# EAGLE board VCSeq PCB2 1.5 TH (EAGLE 6.5.0)
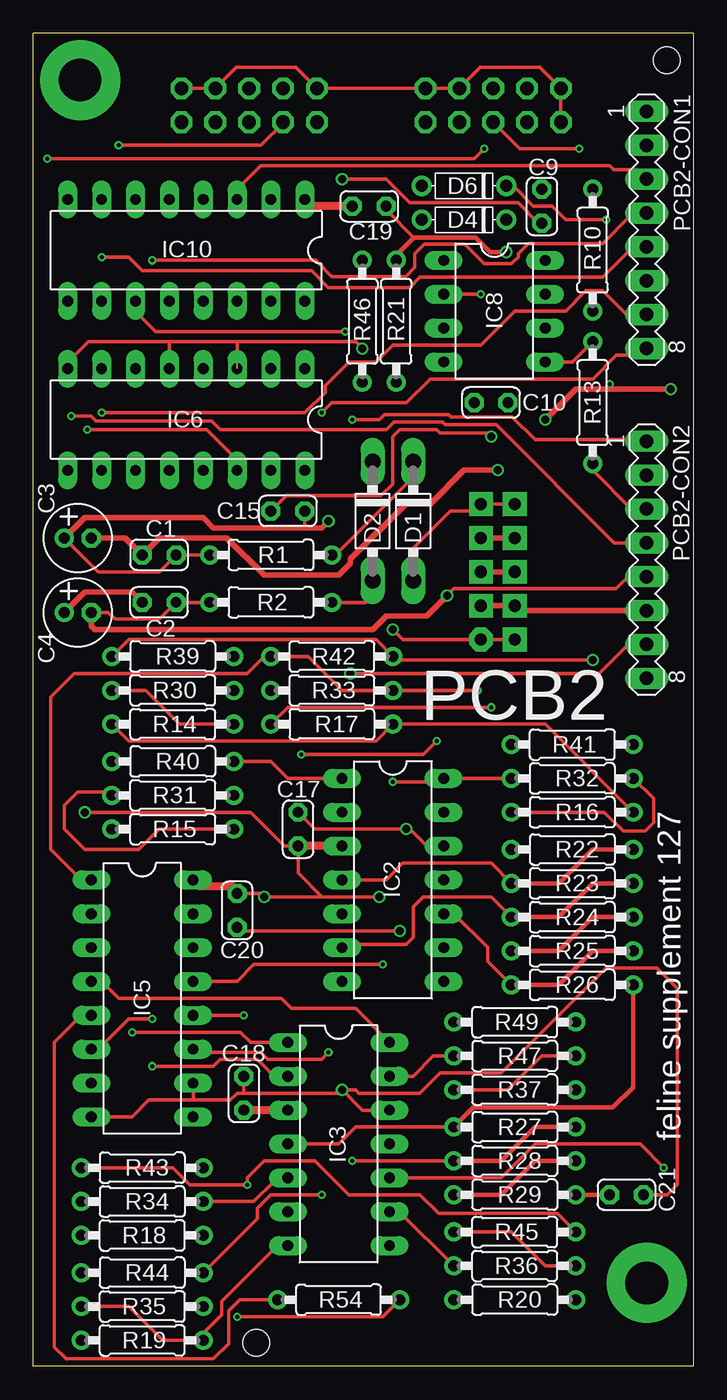
[diagram p0: board, top side]
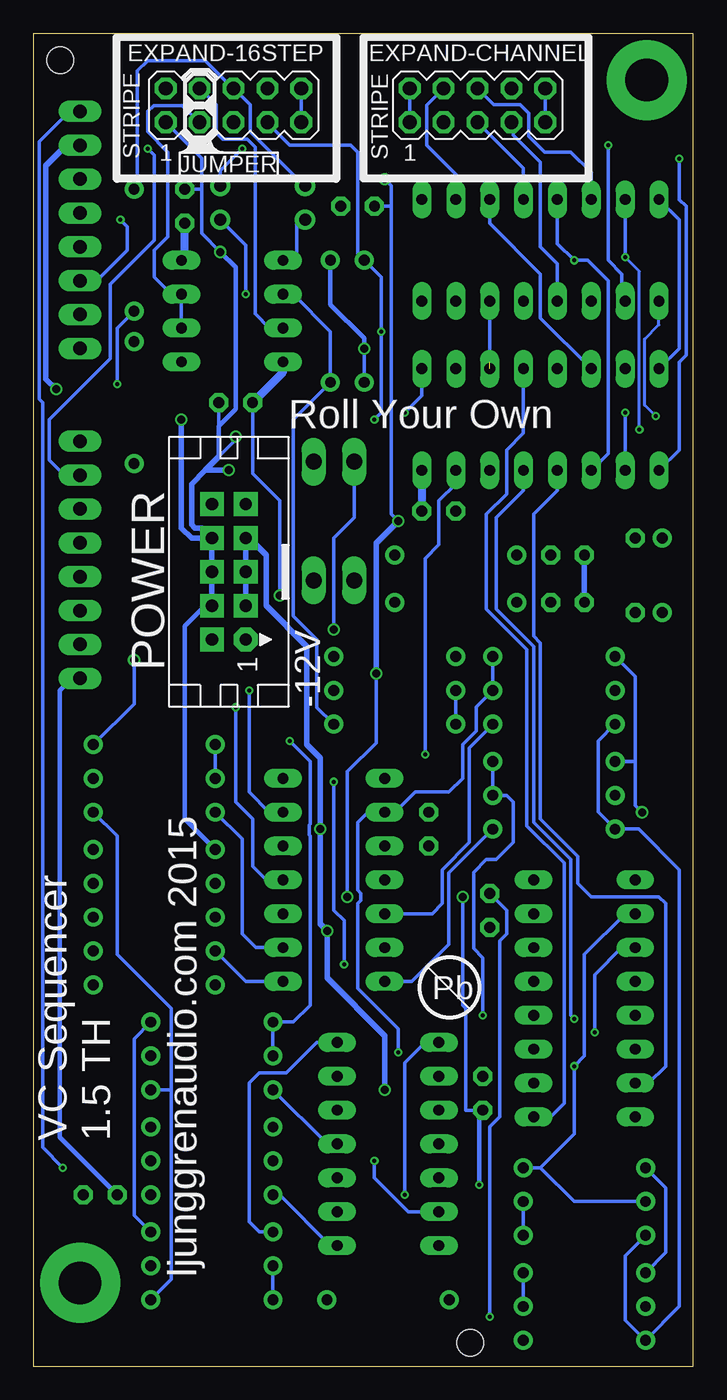
[diagram p1: board, bottom side, seen from below]

Size 49.5 x 100 mm. Coordinates in mm from the lower left corner, seen from the top.
Outline: 0,0 0,100 49.5,100 49.5,0 0,0
Copper layers (1*16): Top 0.035mm / dielectric 1.5mm / Bottom 0.035mm
Design rules "hackvana 12 mil pads 24 mil thermal": minimum track width 6mil, minimum drill 0.3mm, track to track 6mil, track to pad 6mil, pad to pad 6mil, via to via 6mil, smd to smd 0mil, copper to edge 6mil, drill to drill 6mil, minimum pad ring 12mil, minimum via ring 6mil, stop-mask expansion 2mil, vias tented up to drill 100mil, thermal gap 24mil
Holes 2 mm at 47.5,98 16.73,1.75

## Footprints (pad centres in the part's own frame; a part is rotated, then mirrored left to right if it is on the bottom)
C025-024X044 = drill 0.813 octagon: 1 -1.27,0; 2 1.27,0
E2-5 = drill 0.813 pad 1.27: + -1.016,0 | drill 0.813 pad 1.27 octagon: - 1.016,0
DO41-7 = drill 1.2 pad 1.6 long: A 4.445,0; C -4.445,0
DO35-6 = drill 0.9: ANODE 3.175,0; CATHODE -3.175,0
MA05-2 = drill 1.016 octagon: 1 -5.08,-1.27; 2 -5.08,1.27; 3 -2.54,-1.27; 4 -2.54,1.27; 5 0,-1.27; 6 0,1.27; 7 2.54,-1.27; 8 2.54,1.27; 9 5.08,-1.27; 10 5.08,1.27
DIL14 = drill 0.813 long: 1 -7.62,-3.81; 2 -5.08,-3.81; 3 -2.54,-3.81; 4 0,-3.81; 5 2.54,-3.81; 6 5.08,-3.81; 7 7.62,-3.81; 8 7.62,3.81; 9 5.08,3.81; 10 2.54,3.81; 11 0,3.81; 12 -2.54,3.81; 13 -5.08,3.81; 14 -7.62,3.81
DIL16 = drill 0.813 long: 1 -8.89,-3.81; 2 -6.35,-3.81; 3 -3.81,-3.81; 4 -1.27,-3.81; 5 1.27,-3.81; 6 3.81,-3.81; 7 6.35,-3.81; 8 8.89,-3.81; 9 8.89,3.81; 10 6.35,3.81; 11 3.81,3.81; 12 1.27,3.81; 13 -1.27,3.81; 14 -3.81,3.81; 15 -6.35,3.81; 16 -8.89,3.81
DIL08 = drill 0.813 pad 1.27 long: 1 -3.81,-3.81; 2 -1.27,-3.81; 3 1.27,-3.81; 4 3.81,-3.81; 5 3.81,3.81; 6 1.27,3.81; 7 -1.27,3.81; 8 -3.81,3.81
MA08-1 = drill 1.016 long: 1 -8.89,0; 2 -6.35,0; 3 -3.81,0; 4 -1.27,0; 5 1.27,0; 6 3.81,0; 7 6.35,0; 8 8.89,0
CON10L = drill 0.914 pad 1.778 octagon: 1 5.08,1.27 | drill 0.914 pad 1.778 square: 2 5.08,-1.27; 3 2.54,1.27; 4 2.54,-1.27; 5 0,1.27; 6 0,-1.27; 7 -2.54,1.27; 8 -2.54,-1.27; 9 -5.08,1.27; 10 -5.08,-1.27
0207/9 = drill 0.813: 1 -4.58,0; 2 4.58,0

## Placement (x,y rotation side)
C1  100nF  [C025-024X044]  9.44,60.87 180 top
C2  100nF  [C025-024X044]  9.44,57.31 0 top
C3  10uF  [E2-5]  3.34,62.14 0 top
C4  10uF  [E2-5]  3.34,56.55 0 top
C9  100nF  [C025-024X044]  38.14,87.03 270 top
C10  100nF  [C025-024X044]  34.33,72.3 0 top
C15  100nF  [C025-024X044]  19.09,64.17 0 top
C17  100nF  [C025-024X044]  19.85,40.29 270 top
C18  100nF  [C025-024X044]  15.79,20.48 270 top
C19  100nF  [C025-024X044]  25.18,87.03 180 top
C20  100nF  [C025-024X044]  15.28,34.2 90 top
C21  100nF  [C025-024X044]  44.49,12.86 180 top
D1  1N5818  [DO41-7]  28.49,63.41 270 top
D2  1N5818  [DO41-7]  25.44,63.41 270 top
D4  1N4148  [DO35-6]  32.3,86.01 180 top
D6  1N4148  [DO35-6]  32.3,88.55 180 top
EXPAND-16STEP  [MA05-2]  34.49,94.6 0 bottom
EXPAND-CHANNEL  [MA05-2]  16.19,94.6 0 bottom
IC2  LM339  [DIL14]  26.96,36.48 270 top
IC3  LM339  [DIL14]  22.9,16.67 270 top
IC5  4532N  [DIL16]  8.17,27.59 270 top
IC6  CD4516  [DIL16]  11.47,71.03 180 top
IC8  TL072  [DIL08]  34.58,79.15 270 top
IC10  4050N  [DIL16]  11.47,83.73 180 top
PCB2-CON1  [MA08-1]  46,85.25 270 top
PCB2-CON2  [MA08-1]  46,60.5 270 top
POWER  [CON10L]  34.84,59.6 270 bottom
R1  10R  [0207/9]  17.82,60.87 180 top
R2  10R  [0207/9]  17.82,57.31 180 top
R10  1M  [0207/9]  41.95,83.73 90 top
R13  27K  [0207/9]  41.95,72.3 90 top
R14  2.2K  [0207/9]  10.45,48.17 0 top
R15  2.2K  [0207/9]  10.45,40.29 0 top
R16  2.2K  [0207/9]  40.42,41.56 180 top
R17  2.2K  [0207/9]  22.39,48.17 180 top
R18  2.2K  [0207/9]  8.17,9.81 0 top
R19  2.2K  [0207/9]  8.17,1.94 0 top
R20  2.2K  [0207/9]  36.11,4.99 180 top
R21  4.7K  [0207/9]  27.22,78.39 90 top
R22  2.2K  [0207/9]  40.42,38.77 180 top
R23  2.2K  [0207/9]  40.42,36.23 180 top
R24  2.2K  [0207/9]  40.42,33.69 180 top
R25  2.2K  [0207/9]  40.42,31.15 180 top
R26  2.2K  [0207/9]  40.42,28.61 180 top
R27  2.2K  [0207/9]  36.11,17.94 180 top
R28  2.2K  [0207/9]  36.11,15.4 180 top
R29  2.2K  [0207/9]  36.11,12.86 180 top
R30  1M  [0207/9]  10.45,50.71 0 top
R31  1M  [0207/9]  10.45,42.83 0 top
R32  1M  [0207/9]  40.42,44.1 180 top
R33  1M  [0207/9]  22.39,50.71 0 top
R34  1M  [0207/9]  8.17,12.35 180 top
R35  1M  [0207/9]  8.17,4.48 0 top
R36  1M  [0207/9]  36.11,7.53 0 top
R37  27K  [0207/9]  36.11,20.73 180 top
R39  27K  [0207/9]  10.45,53.25 180 top
R40  27K  [0207/9]  10.45,45.37 180 top
R41  27K  [0207/9]  40.42,46.64 0 top
R42  27K  [0207/9]  22.39,53.25 0 top
R43  27K  [0207/9]  8.17,14.89 180 top
R44  27K  [0207/9]  8.17,7.02 180 top
R45  27K  [0207/9]  36.11,10.07 0 top
R46  1M  [0207/9]  24.68,78.39 90 top
R47  1M  [0207/9]  36.11,23.27 180 top
R49  27K  [0207/9]  36.11,25.81 0 top
R54  100K  [0207/9]  22.9,4.99 0 top

## Library data of the parts
C1-C4 C9 C10 C15 C17-C21 D1 D2 D4 D6 IC2 IC3 IC5 IC6 IC8 IC10 R1 R2 R10 R13-R37 R39-R47 R49 R54 = Roll Your Own
EXPAND-16STEP EXPAND-CHANNEL PCB2-CON1 PCB2-CON2 POWER = Roll Your Own; OC_FARNELL: unknown; OC_NEWARK: unknown

## Nets
0V: C1.2 C2.1 C3.- C4.+ C9.1 C10.2 C15.1 C17.1 C18.1 C19.1 C20.1 C21.1 EXPAND-16STEP.1 EXPAND-16STEP.2 EXPAND-16STEP.8 EXPAND-16STEP.9 EXPAND-16STEP.10 EXPAND-CHANNEL.1 EXPAND-CHANNEL.2 EXPAND-CHANNEL.8 EXPAND-CHANNEL.9 EXPAND-CHANNEL.10 IC2.12 IC3.12 IC5.8 IC5.10 IC6.3 IC6.5 IC6.8 IC10.8 IC10.14 PCB2-CON1.2 PCB2-CON2.6 POWER.3 POWER.4 POWER.5 POWER.6 POWER.7 POWER.8 R10.1 R21.2 R22.2 R46.1
5V_REF: C21.2 PCB2-CON2.8 R29.1
+12V: C1.1 C3.+ C9.2 C15.2 C17.2 C18.2 C19.2 C20.2 IC2.3 IC3.3 IC5.16 IC6.16 IC8.8 IC10.1 PCB2-CON2.7 R1.2 R39.2 R40.2 R41.2 R42.2 R43.2 R44.2 R45.2 R49.2 R54.2
-12V: C2.2 C4.- C10.1 IC8.4 PCB2-CON2.5 R2.2
BUS_A2: IC6.6 IC10.3 PCB2-CON1.3
BUS_B2: IC6.11 IC10.5 PCB2-CON1.4
BUS_C2: IC6.14 IC10.7 PCB2-CON1.5
COMP_REF_2: IC3.10 PCB2-CON1.1
CV/CLK-IN: EXPAND-16STEP.3 IC8.6 IC8.7
CV/CLOCK-FROM-EXP: EXPAND-16STEP.4 IC8.3
CV/CLOCK-IN2: PCB2-CON2.3 R13.1
DISABLE2: EXPAND-16STEP.7 IC10.11 PCB2-CON2.1 R46.2
N$1: D4.CATHODE IC8.2 R14.1 R15.1 R16.1 R17.1 R18.1 R19.1 R20.1 R21.1 R37.1
N$5: D4.ANODE IC8.1
N$7: IC8.5 R13.2
N$8: IC3.11 R37.2 R47.1
N$13: IC5.5 R54.1
N$16: IC2.2 IC5.11 R30.2 R39.1
N$17: IC3.13 IC6.15 R47.2 R49.1
N$26: IC2.5 R14.2 R30.1
N$27: D1.A POWER.9 POWER.10
N$28: D1.C R1.1
N$29: D2.A R2.1
N$33: D2.C POWER.1 POWER.2
N$35: IC2.4 R22.1 R23.2
N$36: IC2.1 IC5.12 R31.2 R40.1
N$37: IC2.7 R15.2 R31.1
N$38: IC2.6 R23.1 R24.2
N$40: IC2.14 IC5.13 R32.2 R41.1
N$41: IC2.9 R16.2 R32.1
N$44: IC2.8 R24.1 R25.2
N$45: IC2.13 IC5.1 R33.2 R42.1
N$46: IC2.11 R17.2 R33.1
N$47: IC2.10 R25.1 R26.2
N$49: IC3.2 IC5.2 R34.2 R43.1
N$50: IC3.5 R18.2 R34.1
N$51: IC3.4 R26.1 R27.2
N$53: IC3.1 IC5.3 R35.2 R44.1
N$54: IC3.7 R19.2 R35.1
N$56: IC3.6 R27.1 R28.2
N$57: IC3.14 IC5.4 R36.2 R45.1
N$58: IC3.9 R20.2 R36.1
N$59: IC3.8 R28.1 R29.2
N$62: EXPAND-CHANNEL.4 IC10.2
N$63: EXPAND-CHANNEL.6 IC10.6
N$64: EXPAND-CHANNEL.5 IC10.4
N$65: EXPAND-CHANNEL.3 IC10.10
N$66: EXPAND-CHANNEL.7 IC10.12
OUT2: EXPAND-16STEP.5 PCB2-CON2.2
PE2: IC6.1 PCB2-CON1.8
PRESET_A: IC5.9 IC6.4
PRESET_B: IC5.7 IC6.12
PRESET_C: IC5.6 IC6.13
RESET2: D6.CATHODE IC6.9 PCB2-CON1.6
RESET-EXP: D6.ANODE EXPAND-16STEP.6 R10.2
TRIGS2: IC10.9 PCB2-CON2.4
U/D2: IC6.10 PCB2-CON1.7

## Tracks (layer width: path | path; a pad name or v marks a point on that pad's centre or on a via)
0V  (via drill 0.3, 0.6)  (1 unrouted)
  Top 0.254: EXPAND-CHANNEL.10 EXPAND-CHANNEL.8 15.22,97.44 19.7,97.44 EXPAND-CHANNEL.2 EXPAND-16STEP.10 EXPAND-16STEP.8 33.52,97.44 38,97.44 EXPAND-16STEP.2 EXPAND-16STEP.1 | C19.1 26.45,86.77 28.55,84.68 | C15.1 18.96,65.31 26.07,65.31 26.96,66.2 26.96,69.76 27.47,70.26 30.26,70.26 30.52,70.01 34.07,70.01 v34.33,69.76 | IC6.8 2.58,75.34 4.1,76.87 10.2,76.87 | 10.2,76.87 15.28,76.87 | 15.28,76.87 24.17,76.87 v24.68,76.36 | IC6.5 10.2,76.87 | IC6.3 15.28,76.87 | R21.2 27.22,83.34 | v43.22,73.69 43.22,73.31 | C17.1 21.12,40.29 v27.98,40.29 28.23,40.29 29.5,39.02 IC2.12 | C20.1 15.53,32.67 v27.47,32.67 | IC3.12 24.68,19.21 v23.15,20.73 | C18.1 15.79,20.48 | 15.79,20.48 22.9,20.48 v23.15,20.73 | 15.79,20.48 15.28,20.48 14.77,19.97 11.98,19.97 | IC5.8 7.4,18.7 8.67,19.97 11.98,19.97 | IC5.10 11.98,19.97 | v23.15,20.73 24.17,20.73 24.42,20.48 28.99,20.48 30.52,22 35.09,22 42.96,29.88 46.77,29.88 48.3,28.35 48.3,13.62 47.54,12.86 C21.1
  Top 0.35: v35.47,83.6 34.26,83.6 33.19,84.68 28.55,84.68 27.22,83.34
  Top 0.406: POWER.3 POWER.4 36.47,56.69 PCB2-CON2.6 | POWER.6 POWER.5 | POWER.8 POWER.7 | v47.79,73.31 43.22,73.31 40.68,73.31 v38.39,71.03 | C3.- 6.9,62.14 C1.2 9.44,62.14 14.52,62.14 17.31,59.34 22.9,59.34 23.79,60.23 23.79,60.55 27.91,64.68 29.76,64.68 32.3,67.22 v34.84,67.22 | C4.+ 3.85,58.07 7.4,58.07 C2.1
  Bottom 0.254: EXPAND-CHANNEL.9 EXPAND-CHANNEL.10 | EXPAND-CHANNEL.1 EXPAND-CHANNEL.2 | EXPAND-16STEP.9 EXPAND-16STEP.10 | C10.2 35.6,70.52 | C9.1 36.87,88.3 | 36.87,88.3 36.87,85 v35.47,83.6 | EXPAND-16STEP.1 36.87,90.63 36.87,88.3 | v34.33,69.76 34.33,69.5 35.6,68.23 | IC10.8 1.05,86.01 1.05,76.36 IC6.8 | IC10.14 15.28,75.34 | v24.68,76.36 R46.1 | R10.1 43.22,77.88 v43.22,73.69 | 33.06,61.88 33.31,61.88 POWER.7
  Bottom 0.35: R22.2 38.14,41.06 38.14,55.53 36.61,57.06 POWER.4 | 35.6,68.23 35.6,70.52 34.33,71.79 34.33,82.46 v35.47,83.6 | R21.2 27.22,79.66 24.68,77.12 v24.68,76.36
  Bottom 0.406: POWER.3 POWER.5 POWER.7 | POWER.4 POWER.8 | PCB2-CON1.2 47.03,91.6 48.55,90.08 48.55,74.07 v47.79,73.31 | v38.39,71.03 38.39,62.9 37.63,62.14 POWER.8 | 35.6,68.23 36.61,67.22 | POWER.8 36.87,62.9 37.38,62.9 37.63,63.15 37.63,66.2 36.61,67.22 | C1.2 C2.1 | v34.84,67.22 36.61,67.22 | 33.06,61.88 32.04,60.87 32.04,57.06 28.99,54.01 28.99,46.64 27.98,45.63 v27.98,40.29 27.98,33.18 v27.47,32.67 27.47,29.12 23.15,24.8 v23.15,20.73
5V_REF
  Top 0.35: R29.1 C21.2
  Bottom 0.35: PCB2-CON2.8 46.14,51.47 46.77,51.47 47.54,50.71 47.54,17.18 C21.2
+12V  (via drill 0.3, 0.6)
  Top 0.254: R1.2 C1.1 9.44,59.6 4.86,59.6 C3.+ | C15.2 20.36,62.9 | C9.2 37.88,85.76 36.36,87.28 28.23,87.28 26.45,89.06 v23.15,89.06 | PCB2-CON2.7 44.63,54.15 42.46,51.98 26.96,51.98 | 26.96,51.98 v23.79,51.98 | 26.97,51.98 26.96,51.98 | v3.85,41.56 16.29,41.56 18.83,39.02 C17.2 19.85,36.99 21.63,35.21 | R39.2 7.15,54.52 25.7,54.52 R42.2 27.22,52.99 v41.95,52.99 | R54.2 26.21,3.72 v15.28,3.72 | R43.2 10.45,14.89 11.72,13.62 v16.04,13.62 16.04,14.13 17.31,15.4 21.12,15.4 23.66,12.86 28.99,12.86 30.39,11.46 39.29,11.46 R45.2 | 21.63,35.21 v17.31,35.21 17.06,35.47 C20.2 | 21.63,35.21 v25.95,35.21
  Top 0.406: C3.+ 3.85,63.66 12.74,63.66 13.5,62.9 20.36,62.9 21.63,62.9 v22.14,63.41
  Top 0.6: C19.2 20.87,87.03 IC10.1 | IC2.3 C17.2 | IC3.3 C18.2 | IC5.16 12.42,36.04 14.9,36.04 14.96,35.97 14.96,35.78 C20.2
  Bottom 0.254: C19.2 22.64,87.03 | 22.64,87.03 22.64,63.91 v22.14,63.41 | v23.15,89.06 22.64,88.55 22.64,87.03 | R39.2 4.36,51.73 4.36,45.36 | 4.36,45.36 R40.2 | v3.85,41.56 4.36,42.07 4.36,45.36 | R41.2 41.95,49.7 v41.95,52.99 | v23.79,51.98 23.79,46.77 25.95,44.61 v25.95,35.21 | v17.31,35.21 17.31,27.08 17.06,26.83 17.06,19.21 C18.2 16.04,18.96 | v15.28,3.72 15.28,17.94 14.52,18.7 14.52,31.91 14.01,32.42 14.01,34.2 C20.2 | R43.2 2.07,13.38 2.07,8.53 R44.2 | R49.2 41.95,24.55 41.95,11.34 R45.2
  Bottom 0.35: v16.04,13.62 16.04,18.96
  Bottom 0.406: v23.79,51.98 23.79,61.76 v22.14,63.41
  Bottom 0.6: IC6.16 C15.2 | IC8.8 38.14,83.22 C9.2
-12V  (via drill 0.6)
  Top 0.254: R2.2 C2.2 9.44,56.04 6.13,56.04 5.63,56.55 C4.- | 45.89,59.34 PCB2-CON2.5 44.63,59.23 43.73,58.33 31.53,58.33 v31.03,57.82
  Top 0.406: C4.- 4.36,55.53 4.61,55.28 25.44,55.28 26.45,56.29 29.5,56.29 v31.03,57.82
  Bottom 0.254: C10.1 33.06,66.96 31.03,64.93 v31.03,57.82
  Bottom 0.6: C10.1 30.77,74.58 IC8.4
BUS_A2
  Top 0.254: PCB2-CON1.3 45.3,89.76 43.53,89.76 43.22,90.08 17.06,90.08 15.28,88.3 IC10.3
  Bottom 0.254: IC10.3 15.28,85.76 11.47,81.95 11.47,78.65 IC6.6
BUS_B2  (via drill 0.3)
  Top 0.254: PCB2-CON1.4 45.75,86.27 44.74,86.27 42.71,84.23 37.12,84.23 36.36,83.47 36.36,83.22 35.85,82.71 33.82,82.71 32.36,84.17 29.31,84.17 28.61,83.47 28.61,82.46 27.91,81.76 22.39,81.76 21.18,82.96 v8.93,82.96
  Bottom 0.254: IC10.5 10.2,84.23 v8.93,82.96 7.91,82.96 6.39,81.44 6.39,68.49 IC6.11
BUS_C2  (via drill 0.3)
  Top 0.254: PCB2-CON1.5 45.75,83.73 44.74,83.73 42.71,81.69 28.99,81.69 28.23,80.93 22.14,80.93 20.87,82.2 8.17,82.2 7.15,83.22 v5.12,83.22 | IC6.14 15.28,67.98 12.99,70.26 v4.04,70.26
  Bottom 0.22: v4.04,70.26 4.04,82.14 v5.12,83.22
  Bottom 0.254: v5.12,83.22 IC10.7
COMP_REF_2  (via drill 0.3)
  Top 0.254: v47.28,14.89 45.5,16.67 37.63,16.67 35.09,14.13 IC3.10
  Bottom 0.254: PCB2-CON1.1 46.25,93.89 47.03,93.89 49.06,91.85 49.06,72.55 48.81,72.3 48.81,16.42 v47.28,14.89
CV/CLK-IN
  Bottom 0.254: IC8.6 IC8.7 38.65,80.68 39.41,80.68 40.42,81.69 40.42,83.73 39.41,84.74 39.41,91.09 40.93,92.62 40.93,94.14 40.49,94.58 38.33,94.58 37.07,93.33 EXPAND-16STEP.3
CV/CLOCK-FROM-EXP
  Bottom 0.254: EXPAND-16STEP.4 35.79,94.63 35.79,92.55 35.28,92.04 33.44,92.04 32.87,91.47 32.87,78.96 31.79,77.88 IC8.3
CV/CLOCK-IN2
  Top 0.254: PCB2-CON2.3 44.85,64.31 41.95,67.22 R13.1
DISABLE2  (via drill 0.3)
  Top 0.254: PCB2-CON2.1 45.89,69.5 37.63,69.5 35.92,71.22 31.34,71.22 31.15,71.41 26.33,71.41 25.95,71.03 v23.91,71.03 | IC10.11 7.66,79.15 9.18,77.63 v23.41,77.63
  Bottom 0.254: v23.91,71.03 23.41,71.53 v23.41,77.63 23.41,81.69 R46.2 25.18,83.48 25.18,91.09 25.69,91.6 30.26,91.6 31.95,93.28 EXPAND-16STEP.7
N$1  (via drill 0.3)
  Top 0.254: v33.57,80.42 IC8.2 | R14.1 7.15,46.9 25.7,46.9 R17.1 38.4,48.17 R16.1
  Bottom 0.254: D4.CATHODE 33.57,84.11 v33.57,80.42 | IC8.2 30.01,80.42 27.22,77.63 R21.1 30.01,71.02 30.01,56.29 28.23,54.52 28.23,49.44 R17.1 | R14.1 7.15,46.9 7.15,41.57 R15.1 4.1,40.29 1.05,37.24 1.05,4.48 R19.1 5.12,3.46 5.12,8.28 R18.1 | R20.1 39.15,6.52 39.15,20.73 | R37.1 39.15,20.73 | 39.15,20.73 39.15,26.83 43.22,30.89 43.22,39.78 R16.1
N$5
  Bottom 0.254: IC8.1 30.26,83.47 29.76,83.47 29.76,85.76 29.5,86.01 D4.ANODE
N$7
  Top 0.254: R13.2 40.42,75.34 IC8.5
N$8
  Top 0.254: R37.2 35.6,20.73 38.14,23.27 R47.1
  Bottom 0.254: IC3.11 27.46,16.67 R37.2
N$13
  Top 0.254: R54.1 15.47,4.99 14.64,4.16 14.64,1.68 13.5,0.54 2.45,0.54 1.56,1.43 1.56,24.29 3.59,26.32 IC5.5
N$16  (via drill 0.3)
  Top 0.254: v22.14,23.53 21.63,23.02 17.56,23.02 17.06,23.53 12.99,23.53 12.74,23.78 IC5.11
  Bottom 0.254: R39.1 R30.2 16.29,49.44 16.29,47.66 17.31,46.64 17.31,44.1 18.33,43.09 20.87,43.09 22.39,41.56 IC2.2 24.42,41.56 25.18,40.8 25.18,35.72 24.93,35.47 24.93,34.96 25.18,34.7 25.18,28.35 22.14,25.31 v22.14,23.53
N$17  (via drill 0.3)
  Top 0.254: IC3.13 28.49,21.75 30.01,23.27 R47.2 | v30.26,46.9 29.25,45.88 v20.1,45.88
  Bottom 0.254: R47.2 R49.1 30.01,25.81 28.74,27.08 28.74,39.78 28.8,39.85 28.8,40.61 28.74,40.67 28.74,45.37 v30.26,46.9 | v20.1,45.88 20.1,60.61 19.09,61.63 19.09,64.93 17.82,66.2 IC6.15
N$26
  Top 0.254: R30.1 8.42,50.71 10.96,48.17 R14.2
  Bottom 0.254: IC2.5 19.6,33.94 18.83,34.7 18.83,37.24 16.8,39.28 16.8,46.39 15.03,48.16 R14.2
N$27
  Top 0.254: POWER.10 POWER.9 33.06,64.17 31.28,64.17 28.49,61.37 D1.A
N$28
  Top 0.254: D1.C 28.23,67.6 28.23,66.45 22.64,60.87 R1.1
N$29
  Top 0.254: D2.A 25.44,57.82 24.93,57.31 R2.1
N$33  (via drill 0.6)
  Top 0.254: POWER.2 POWER.1 27.72,54.52 v26.96,55.28
  Bottom 0.254: D2.C 25.44,63.66 26.96,62.14 v26.96,55.28
N$35
  Top 0.254: IC2.4 26.45,36.48 27.72,37.75 34.33,37.75 R23.2
  Top 0.35: R23.2 39.41,36.23 41.95,38.77 R22.1
N$36  (via drill 0.3)
  Top 0.254: IC2.1 19.09,44.1 17.82,45.37 R40.1 | IC5.12 v15.79,26.32
  Bottom 0.254: R40.1 R31.2 14.01,42.83 13.5,42.32 13.5,39.28 14.77,38.01 15.53,38.01 16.48,37.05 16.48,31.34 15.79,30.64 v15.79,26.32
N$37
  Top 0.254: R15.2 9.44,40.29 7.91,38.77 3.85,38.77 2.32,40.29 2.32,42.07 3.34,43.09 5.62,43.09 R31.1
  Bottom 0.254: IC2.7 21.12,28.86 18.33,31.66 18.33,37 R15.2
N$38
  Top 0.254: IC2.6 23.41,31.66 27.98,31.66 28.49,32.16 28.49,34.45 29.25,35.21 34.33,35.21 R24.2
  Top 0.35: R24.2 39.41,33.69 41.95,36.23 R23.1
N$40  (via drill 0.3)
  Top 0.254: R32.2 IC2.14 30.52,43.85 v26.96,43.85 | v26.2,30.13 16.55,30.13 15.28,28.86 IC5.13
  Bottom 0.254: R41.1 R32.2 | v26.96,43.85 26.96,34.2 26.2,33.43 v26.2,30.13
N$41
  Top 0.254: R16.2 42.84,41.56 44.23,40.16 45.88,40.16 46.52,40.8 46.52,42.59 R32.1
  Bottom 0.254: R16.2 33.82,39.54 33.82,32.42 32.8,31.4 IC2.9
N$44
  Top 0.35: R25.2 39.41,31.15 41.95,33.69 R24.1
  Bottom 0.254: R25.2 33.56,28.86 IC2.8
N$45  (via drill 0.3)
  Top 0.254: v33.31,50.71 R33.2 23.15,50.71 20.61,53.25 R42.1 17.31,53.25 16.04,51.98 3.09,51.98 1.31,50.2 1.31,38.77 3.59,36.48 IC5.1
  Bottom 0.254: v33.31,50.71 33.31,43.09 31.79,41.56 IC2.13
N$46  (via drill 0.3)
  Top 0.254: v34.33,49.44 19.08,49.44 R17.2
  Bottom 0.254: R33.1 R17.2 | IC2.11 32.04,36.48 33.06,37.5 33.06,41.05 34.33,42.32 v34.33,49.44
N$47
  Top 0.254: R26.2 34.07,30.38 34.07,31.4 31.53,33.94 IC2.10
  Top 0.35: R26.2 39.41,28.61 41.95,31.15 R25.1
N$49  (via drill 0.3)
  Top 0.254: IC3.2 18.83,22 17.82,22 16.8,23.02 14.01,23.02 13.5,22.51 v8.93,22.51
  Bottom 0.254: R34.2 8.93,12.35 11.47,14.89 | 11.47,14.89 R43.1 | 11.47,14.89 8.93,17.43 v8.93,22.51 8.17,23.27 8.17,30.89 5.12,33.94 IC5.2
N$50
  Top 0.254: IC3.5 18.83,13.88 18.07,13.88 16.55,12.35 R34.1
  Bottom 0.254: R18.2 R34.1
N$51
  Top 0.254: R27.2 24.17,17.94 22.9,16.67 IC3.4
  Top 0.35: R27.2 32.99,19.4 43.47,19.4 45,20.93 R26.1
N$53  (via drill 0.3)
  Top 0.254: R44.1 16.8,11.07 16.8,11.84 17.82,12.86 v21.63,12.86 | IC3.1 16.29,24.29 15.53,25.05 v7.4,25.05
  Bottom 0.254: R35.2 R44.1 | v21.63,12.86 21.63,22.77 20.1,24.29 IC3.1 | v7.4,25.05 7.4,29.37 5.37,31.4 IC5.3
N$54
  Top 0.254: R35.1 7.15,4.48 9.69,1.94 R19.2 12.75,2.45 14.13,3.84 14.13,4.86 18.07,8.8 18.83,8.54 18.83,8.8 IC3.7
N$56  (via drill 0.3)
  Top 0.254: R28.2 v23.91,15.4
  Top 0.35: R28.2 35.09,15.4 37.63,17.94 R27.1
  Bottom 0.254: v23.91,15.4 23.91,14.13 21.37,11.59 IC3.6
N$57
  Top 0.254: R36.2 38.39,7.53 35.85,10.07 R45.1 | IC3.14 24.17,26.83 19.34,26.83 18.58,27.59 6.39,27.59 5.12,28.86 IC5.4
  Bottom 0.254: IC3.14 28.23,24.29 30.52,22 32.55,22 33.31,21.24 33.31,10.83 32.55,10.07 R45.1
N$58
  Top 0.254: R36.1 27.46,11.59 IC3.9
  Bottom 0.254: R20.2 R36.1
N$59
  Top 0.35: R29.2 35.09,12.86 37.63,15.4 R28.1
  Bottom 0.254: IC3.8 27.22,9.05 31.03,12.86 R29.2
N$62
  Bottom 0.254: EXPAND-CHANNEL.4 19.98,94.62 19.98,91.6 17.82,89.44 IC10.2
N$63
  Bottom 0.254: EXPAND-CHANNEL.6 14.97,94.65 12.99,94.65 12.36,94.01 12.36,92.3 11.15,91.09 9.18,91.09 7.66,89.57 IC10.6
N$64
  Bottom 0.254: EXPAND-CHANNEL.5 12.74,89.88 IC10.4
N$65  (via drill 0.3)
  Top 0.254: v6.39,91.6 17.06,91.6 18.73,93.27 EXPAND-CHANNEL.3
  Bottom 0.254: IC10.10 5.37,80.17 5.37,81.95 6.39,82.96 v6.39,91.6
N$66
  Bottom 0.254: EXPAND-CHANNEL.7 13.5,93.18 13.5,92.36 11.47,90.33 11.47,83.98 10.2,82.71 IC10.12
N$69  (via drill 3.2 pad 6)
  other vias: 3.5,96.5
N$70  (via drill 3.2 pad 6)
  other vias: 46,6.25
OUT2  (via drill 0.3)
  Top 0.254: v40.93,91.35 36.47,91.35 EXPAND-16STEP.5
  Bottom 0.254: PCB2-CON2.2 46.11,66.96 47.28,66.96 48.3,67.98 48.3,71.03 43.73,75.6 43.73,81.19 40.42,84.49 40.42,90.84 v40.93,91.35
PE2  (via drill 0.3)
  Top 0.254: PCB2-CON1.8 45.49,75.85 43.73,75.85 41.95,74.07 29.76,74.07 27.98,72.3 22.39,72.3 v21.63,71.53
  Bottom 0.254: v21.63,71.53 20.36,72.8 IC6.1
PRESET_A
  Bottom 0.254: IC6.4 12.74,70.01 14.01,68.74 14.01,65.44 15.53,63.91 15.53,56.8 12.48,53.75 12.48,40.55 9.69,37.75 9.69,19.72 10.71,18.7 IC5.9
PRESET_B
  Bottom 0.254: IC6.12 10.2,65.69 11.98,63.91 11.98,54.77 11.47,54.26 11.47,41.05 8.67,38.26 8.67,36.23 7.66,35.21 2.58,35.21 2.07,34.7 2.07,22.51 3.34,21.24 IC5.7
PRESET_C  (via drill 0.3)
  Top 0.254: v8.93,26.07 7.15,26.07 4.86,23.78 IC5.6
  Bottom 0.254: IC6.13 12.74,65.69 14.77,63.66 14.77,56.8 11.98,54.01 11.98,40.8 9.18,38.01 9.18,26.32 v8.93,26.07
RESET2  (via drill 0.3)
  Top 0.254: v42.96,86.01 39.92,86.01 38.9,87.03 37.5,87.03 35.98,88.55 D6.CATHODE | v1.05,90.58 33.06,90.58 v33.82,91.35
  Bottom 0.254: PCB2-CON1.6 44.74,81.44 42.46,83.73 42.46,85.5 v42.96,86.01 | IC6.9 1.05,68.74 1.05,75.34 0.55,75.85 0.55,87.03 1.05,87.54 v1.05,90.58 | v33.82,91.35 35.47,89.69 D6.CATHODE
RESET-EXP
  Bottom 0.254: D6.ANODE 29.18,88.55 33.25,92.62 33.25,94.63 EXPAND-16STEP.6 34.53,95.87 36.61,97.95 40.93,97.95 41.69,97.19 41.69,88.56 R10.2
TRIGS2  (via drill 0.3)
  Top 0.254: PCB2-CON2.4 43.58,61.77 34.71,70.64 30.9,70.64 30.71,70.83 27.03,70.83 26.45,70.26 14.01,70.26 13.37,70.9 4.74,70.9 4.36,71.28 v2.83,71.28
  Bottom 0.22: v2.83,71.28 3.66,72.11 3.66,77.06 2.58,78.14 IC10.9
U/D2  (via drill 0.3)
  Top 0.254: PCB2-CON1.7 44.49,78.9 42.71,80.68 41.44,80.68 39.92,79.15 36.11,79.15 33.57,76.61 26.96,76.61 25.69,75.34 23.66,75.34 21.88,73.57 21.88,73.06 20.36,71.53 v5.12,71.53
  Bottom 0.254: v5.12,71.53 IC6.10

## Text on the board
tPlace: PCB2 | feline supplement 127
bPlace: STRIPE | JUMPER | STRIPE | Roll Your Own | -12V | Pb | VC Sequencer / 1.5 TH | ljunggrenaudio.com 2015